# Altium PCB PONG_2.PcbDoc (part 1 of 3)
Units mm, origin at the board's own origin, x right, y up, seen from the top; angles counter-clockwise.
Board outline 310.01 x 220.09 mm, 2 copper layers (Top Layer, Bottom Layer); 106 components, 226 nets, 1005 pads, 373 vias.
Unrouted connection lines stored in the file: 5.
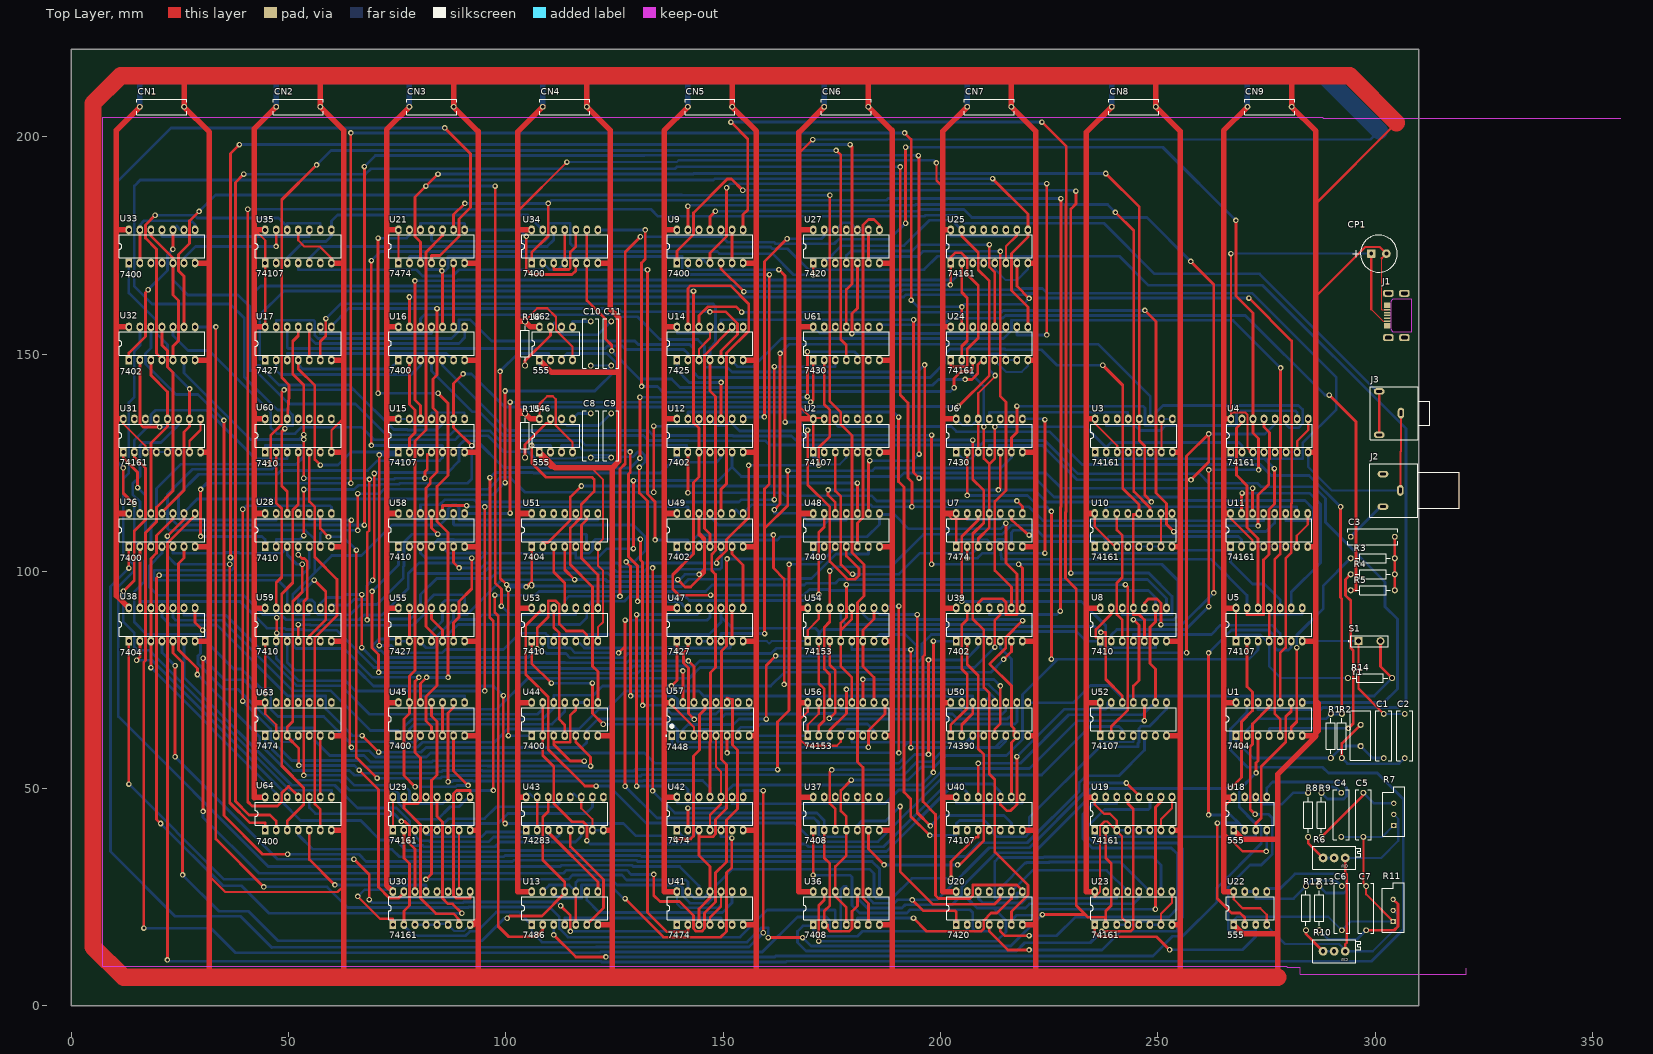
[diagram p0: Top Layer view]
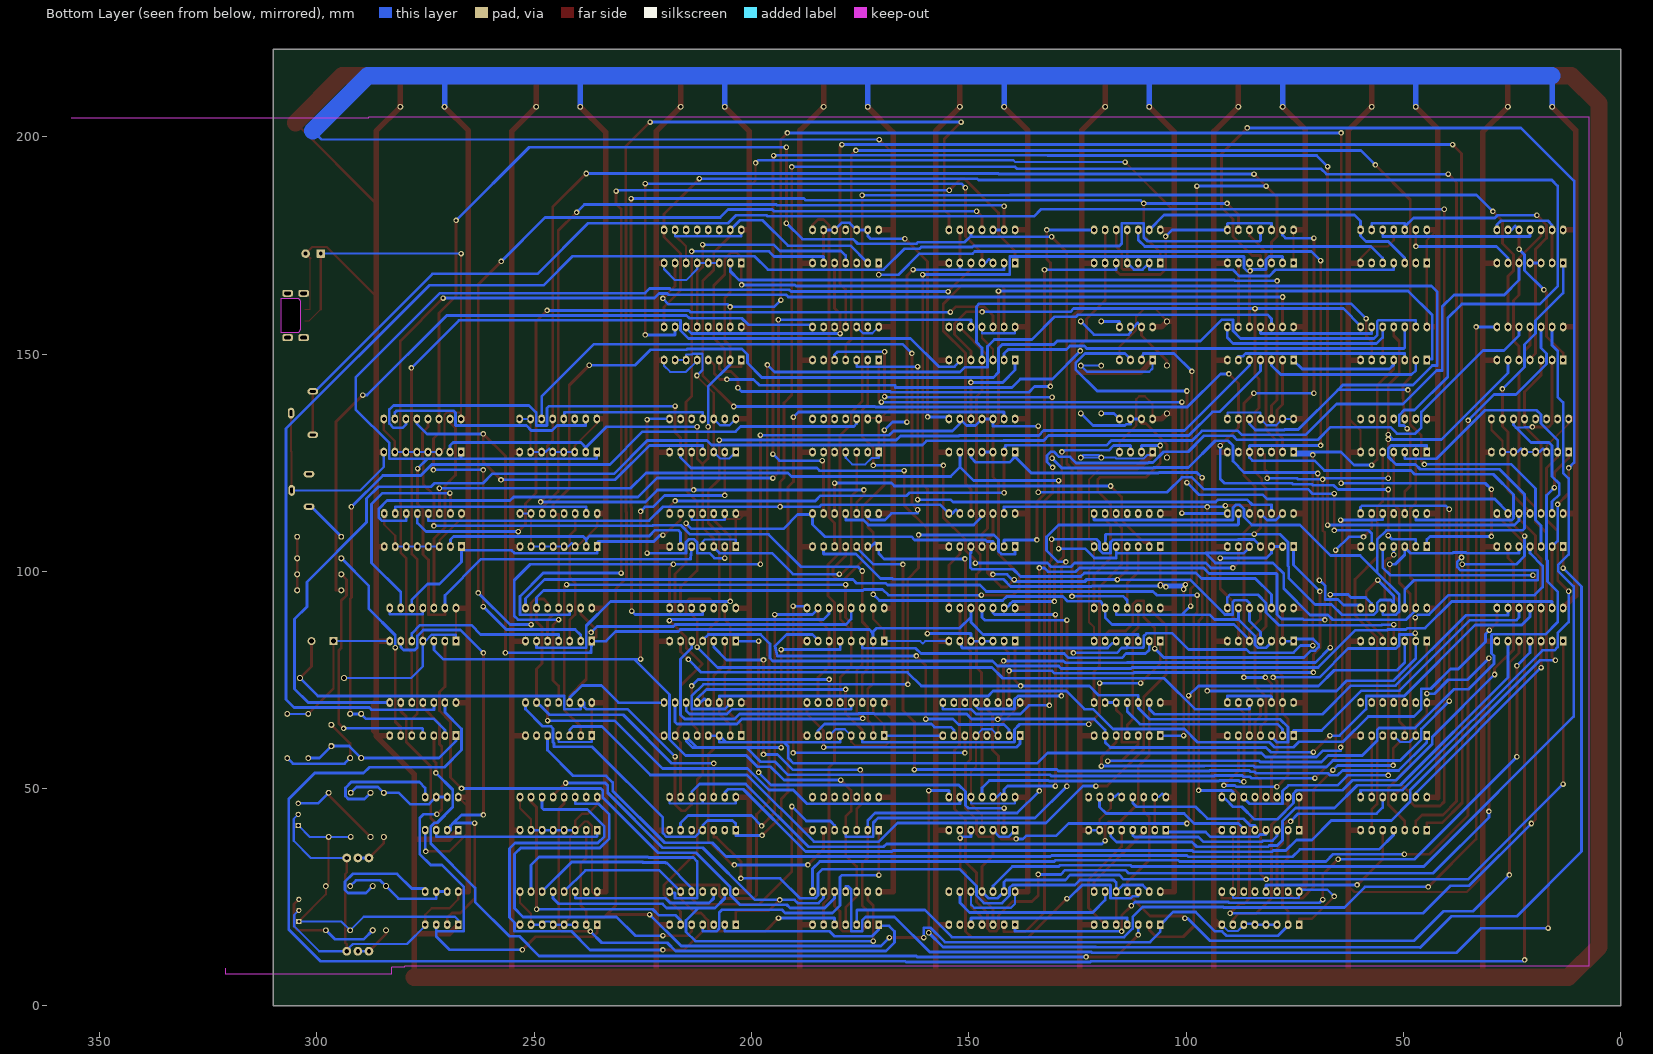
[diagram p1: Bottom Layer view, seen from below]

## Layer stack, top to bottom
Top Solder: solder mask 0.0102, Solder Resist, Dk 3.5
Top Layer: signal copper 0.0356
Dielectric 1: dielectric 0.32, FR-4, Dk 4.8
Bottom Layer: signal copper 0.0356
Bottom Solder: solder mask 0.0102, Solder Resist, Dk 3.5

## Board outline
0,0 310.007,0 310.007,220.091 0,220.091

## Design rules (kind name [scope] priority, off if disabled: settings)
Clearance Clearance_1 [All] p1: gap=0.18 except(0.5: Track-Track)
Clearance [All] p2: gap=0.18
PolygonConnect [All] p1: connectstyle=Relief reliefconductorwidth=0.254 reliefentries=4 polygonreliefangle="90 Angle" airgapwidth=0.254
RoutingTopology VCC_GND_Shortest [(InNet('VCC') OR InNet('GND'))] p1: topology=Shortest
RoutingTopology HorizBot [OnLayer('Bottom Layer')] p2: topology=Horizontal
RoutingTopology VertTop [OnLayer('Top Layer')] p3: topology=Vertical
RoutingTopology [All] p4: topology=Shortest
RoutingVias [All] p1: holewidth=0.711 width=1.27 viastyle="Through Hole" minholewidth=0.711 minwidth=1.27 maxholewidth=0.711 maxwidth=1.27
SMDNeckDown [All] p1: percent=50.000
SolderMaskExpansion [All] p1: expansion=0.102
Width "Power Width" [(InNet('VCC') OR InNet('GND'))] p1: maxlimit=4 minlimit=0.508 preferedwidth=0.508
Width [All] p2: maxlimit=0.635 minlimit=0.635 preferedwidth=0.635
29 further rules are at their usual default settings.

## Classes and differential pairs
component class VSYNC: U10 U11 U12
component class VertBallCounter: U29 U30
component class VertBallControl: U36 U37 U38 U39 U40 U41 U42 U43
component class SYNC-VideoSum: C3 J2 R3 R4 R5 U13 U14
component class Sound: C10 C11 J3 R16 U62 U63 U64
component class ScoreDisplay_2: U58 U59 U60 U61
component class ScoreDisplay_1: U54 U55 U56 U57
component class ScoreCount: U49 U50 U51 U52 U53
component class POWER: CN1 CN2 CN3 CN4 CN5 CN6 CN7 CN8 CN9 CP1 J1
component class Paddle_2: C6 C7 R10 R11 R12 R13 U21 U22 U23
component class Paddle_1: C4 C5 R6 R7 R8 R9 U18 U19 U20
component class Net: U15 U16 U17
component class HSYNC: U3 U4 U5 U6 U7 U8 U9
component class HorizBallCounter: U24 U25 U26 U27 U28
component class HorizBallControl: U31 U32 U33 U34 U35
component class GameControl: C8 C9 R14 R15 S1 U44 U45 U46 U47 U48
component class CLK: C1 C2 R1 R2 U1 U2 Y1

## Components (designator, comment, footprint, x,y, rotation, side; value= is the part's Value field where it differs from the comment)
C1 "Cap" CAPR10.16-11.5x3.6 302.006,62.103 r270 top
C2 "Cap" CAPR10.16-11.5x3.6 306.832,62.103 r270 top
C3 "Cap" CAPR10.16-11.5x3.6 299.466,107.95 r180 top
C4 "Cap" CAPR10.16-11.5x3.6 292.227,43.942 r90 top
C5 "Cap" CAPR10.16-11.5x3.6 297.307,43.942 r90 top
C6 "Cap" CAPR10.16-11.5x3.6 292.354,22.479 r90 top
C7 "Cap" CAPR10.16-11.5x3.6 297.942,22.479 r270 top
C8 "Cap" CAPR10.16-11.5x3.6 119.507,131.245 r90 top
C9 "Cap" CAPR10.16-11.5x3.6 124.206,131.245 r90 top
C10 "Cap" CAPR10.16-11.5x3.6 119.507,152.421 r90 top
C11 "Cap" CAPR10.16-11.5x3.6 124.206,152.421 r90 top
CN1 "Cap" CAPR10.16-11.5x3.6 20.828,206.883 r180 top
CN2 "Cap" CAPR10.16-11.5x3.6 52.197,206.883 r180 top
CN3 "Cap" CAPR10.16-11.5x3.6 82.863,206.883 r180 top
CN4 "Cap" CAPR10.16-11.5x3.6 113.529,206.883 r180 top
CN5 "Cap" CAPR10.16-11.5x3.6 146.95,206.883 r180 top
CN6 "Cap" CAPR10.16-11.5x3.6 178.324,206.883 r180 top
CN7 "Cap" CAPR10.16-11.5x3.6 211.222,206.883 r180 top
CN8 "Cap" CAPR10.16-11.5x3.6 244.475,206.883 r180 top
CN9 "Cap" CAPR10.16-11.5x3.6 275.717,206.883 r180 top
CP1 "Cap" CAPE3.5mm 300.863,173.101 r0 top
J1 "USB Micro Type B (recommended if hand soldering)" USB_Micro-B_FCI_SMD 308.356,158.877 r90 top
J2 "Video OUT" RCA 305.816,118.618 r180 top
J3 "Audio OUT" "3.5mm Audio Jack Parallel" 305.943,136.398 r180 top
R1 "Res1" AXIAL-0.4 289.814,62.103 r270 top
R2 "Res1" AXIAL-0.4 292.354,62.103 r270 top
R3 "Res1" AXIAL-0.4 299.466,102.997 r0 top
R4 "Res1" AXIAL-0.4 299.466,99.314 r0 top
R5 "Res1" AXIAL-0.4 299.466,95.631 r0 top
R6 "RPot" TRIMPOT_THT_PV36X 290.576,34.036 r180 top
R7 "RPot" VR5 304.292,44.069 r90 top
R8 "Res1" AXIAL-0.4 284.607,43.942 r270 top
R9 "Res1" AXIAL-0.4 287.655,43.942 r270 top
R10 "RPot" TRIMPOT_THT_PV36X 290.576,12.573 r180 top
R11 "RPot" VR5 304.165,21.971 r90 top
R12 "Res1" AXIAL-0.4 284.099,22.479 r270 top
R13 "Res1" AXIAL-0.4 287.147,22.479 r270 top
R14 "Res1" AXIAL-0.4 298.831,75.438 r180 top
R15 "Res1" AXIAL-0.4 104.394,131.245 r90 top
R16 "Res1" AXIAL-0.4 104.394,152.421 r90 top
S1 "COIN SW" SPST-2 298.704,83.947 r0 top
U1 "7404" N014 275.622,65.986 r0 top
U2 "74107" N014D 178.324,131.245 r0 top
U3 "74161" N016 244.475,131.245 r0 top
U4 "74161" N016 275.717,131.245 r0 top
U5 "74107" N014 275.622,87.739 r0 top
U6 "7430" N014 211.222,131.245 r0 top
U7 "7474" N014D 211.222,109.492 r0 top
U8 "7410" N014 244.375,87.739 r0 top
U9 "7400" N014 146.95,174.752 r0 top
U10 "74161" N016 244.375,109.492 r0 top
U11 "74161" N016 275.622,109.492 r0 top
U12 "7402" N014 146.95,131.245 r0 top
U13 "7486" N014 113.529,22.479 r0 top
U14 "7425" N014 146.95,152.421 r0 top
U15 "74107" N014 82.863,131.245 r0 top
U16 "7400" N014 82.863,152.421 r0 top
U17 "7427" N014 52.197,152.421 r0 top
U18 "555" P008 271.272,44.232 r0 top
U19 "74161" N016 244.375,44.232 r0 top
U20 "7420" N014 211.222,22.479 r0 top
U21 "7474" N014D 82.863,174.752 r0 top
U22 "555" P008 271.272,22.479 r0 top
U23 "74161" N016 244.375,22.479 r0 top
U24 "74161" N016 211.222,152.421 r0 top
U25 "74161" N016 211.222,174.752 r0 top
U26 "7400" N014 20.828,109.492 r0 top
U27 "7420" N014 178.324,174.752 r0 top
U28 "7410" N014 52.197,109.492 r0 top
U29 "74161" N016 82.863,44.232 r0 top
U30 "74161" N016 82.863,22.479 r0 top
U31 "74161" N016 20.828,131.245 r0 top
U32 "7402" N014 20.828,152.421 r0 top
U33 "7400" N014 20.828,174.752 r0 top
U34 "7400" N014 113.529,174.752 r0 top
U35 "74107" N014 52.197,174.752 r0 top
U36 "7408" N014 178.324,22.479 r0 top
U37 "7408" N014 178.324,44.232 r0 top
U38 "7404" N014 20.828,87.739 r0 top
U39 "7402" N014 211.222,87.739 r0 top
U40 "74107" N014 211.222,44.232 r0 top
U41 "7474" N014D 146.95,22.479 r0 top
U42 "7474" N014D 146.95,44.232 r0 top
U43 "74283" N016D#1 113.529,44.232 r0 top
U44 "7400" N014 113.529,65.986 r0 top
U45 "7400" N014 82.863,65.986 r0 top
U46 "555" P008 111.506,131.245 r0 top
U47 "7427" N014 146.95,87.739 r0 top
U48 "7400" N014 178.324,109.492 r0 top
U49 "7402" N014 146.95,109.492 r0 top
U50 "74390" N016 211.222,65.986 r0 top
U51 "7404" N014 113.529,109.492 r0 top
U52 "74107" N014 244.375,65.986 r0 top
U53 "7410" N014 113.529,87.739 r0 top
U54 "74153" N016 178.324,87.739 r0 top
U55 "7427" N014 82.863,87.739 r0 top
U56 "74153" N016 178.324,65.986 r0 top
U57 "7448" N016D#2 147.066,65.986 r90 top
U58 "7410" N014 82.863,109.492 r0 top
U59 "7410" N014 52.197,87.739 r0 top
U60 "7410" N014 52.197,131.245 r0 top
U61 "7430" N014 178.324,152.421 r0 top
U62 "555" P008 111.506,152.421 r0 top
U63 "7474" N014D 52.197,65.986 r0 top
U64 "7400" N014 52.197,44.232 r0 top
Y1 "14.318 Mhz" HC-49U 296.672,62.23 r90 top

## Footprints (in the part's own frame and the unit in brackets; to place one, negate y for a bottom-side part, rotate by r counter-clockwise, add the part's x,y. Pads: shape width x height; smd on the part's side, far side on the other; paste and mask are expansions set on the pad)
"3.5mm Audio Jack Parallel" [mm] "3.5mm Audio Jack, 3 pin"
  oval 1.5x2.5 hole 0.6 slot 1.31 at 90 deg: 1(0,0)
  oval 2.5x1.5 hole 0.6 slot 1.31 at 0 deg: 2(5,5) 5(5,-5)
  silkscreen extent -6.62,-6.13 7,6.13
AXIAL-0.4 [mm] "Axial Device, Thru-Hole; 2 Leads; 0.4 in Pin Spacing"
  round 1.4 hole 0.85: 1(-5.08,0) 2(5.08,0)
  silkscreen extent -4.06,-1.02 4.06,1.02
CAPE3.5mm [mm]
  round 0.508 on Mech15: 0(0,0)
  rrect25% 2x2 hole 0.9: 1(-1.75,0)
  round 2 hole 0.9: 2(1.75,0)
  silkscreen extent -6.05,-4.25 4.25,4.25, body extent -4.25,-4.25 4.22,4.23, height 7.1
CAPR10.16-11.5x3.6 [mm] "Capacitor, Ceramic, Thru-Hole, Dipped Radial; Body 11.5 x 3.6 mm (WxT) Pin Spacing 10.16 mm (typ)"
  round 1.35 hole 0.8: 1(-5.08,0) 2(5.08,0)
  silkscreen extent -5.75,-1.8 5.75,1.8
HC-49U [mm] "Quartz Crystal, Thru-Hole; 2 Leads; Body 11.35 x 4.65 x 13.46 mm (LxWxH max)"
  oct 1.4x1.4 hole 0.8: 1(-2.44,0)
  round 1.4 hole 0.8: 2(2.44,0)
  silkscreen extent -5.7,-2.35 5.7,2.35
N014 [mil] "DIP; 14 Leads; Row Spacing 7.62 mm; Pitch 2.54 mm"
  rect 60x80 hole 35.43: 1(-300,-150)
  oval 60x80 hole 35.43: 2(-200,-150) 3(-100,-150) 4(0,-150) 5(100,-150) 6(200,-150) 7(300,-150) 8(300,150) 9(200,150) 10(100,150) 11(0,150) 12(-100,150) 13(-200,150) 14(-300,150)
  silkscreen extent -388,-104 388,104
N014D [mil] "DIP; 14 Leads; Row Spacing 7.62 mm; Pitch 2.54 mm"
  rect 60x80 hole 35.43: 1(-300,-150)
  oval 60x80 hole 35.43: 2(-200,-150) 3(-100,-150) 4(0,-150) 5(100,-150) 6(200,-150) 7(300,-150) 8(300,150) 9(200,150) 10(100,150) 11(0,150) 12(-100,150) 13(-200,150) 14(-300,150)
  silkscreen extent -388,-104 388,104
N016 [mil] "DIP; 16 Leads; Row Spacing 7.62 mm; Pitch 2.54 mm"
  rect 60x80 hole 35.43: 1(-350,-150)
  oval 60x80 hole 35.43: 2(-250,-150) 3(-150,-150) 4(-50,-150) 5(50,-150) 6(150,-150) 7(250,-150) 8(350,-150) 9(350,150) 10(250,150) 11(150,150) 12(50,150) 13(-50,150) 14(-150,150) 15(-250,150) 16(-350,150)
  silkscreen extent -388,-104 388,104
N016D#1 [mil] "DIP; 16 Leads; Row Spacing 7.62 mm; Pitch 2.54 mm"
  rect 60x80 hole 35.43: 1(-350,-150)
  oval 60x80 hole 35.43: 2(-250,-150) 3(-150,-150) 4(-50,-150) 5(50,-150) 6(150,-150) 7(250,-150) 8(350,-150) 9(350,150) 10(250,150) 11(150,150) 12(50,150) 13(-50,150) 14(-150,150) 15(-250,150) 16(-350,150)
  silkscreen extent -388,-104 388,104
N016D#2 [mil] "DIP, 16-Leads, Row Spacing 7.62mm, Pitch 2.54mm, Body 19.31x6.35mm"
  rect 80x60 hole 35.43: 1(-150,350)
  oval 80x60 hole 35.43: 2(-150,250) 3(-150,150) 4(-150,50) 5(-150,-50) 6(-150,-150) 7(-150,-250) 8(-150,-350) 9(150,-350) 10(150,-250) 11(150,-150) 12(150,-50) 13(150,50) 14(150,150) 15(150,250) 16(150,350)
  silkscreen extent -155,-390 104,406, body extent -130,-390 130,390, height 200
P008 [mil] "DIP; 8 Leads; Row Spacing 7.62 mm; Pitch 2.54 mm"
  rect 60x80 hole 35.43: 1(-150,-150)
  oval 60x80 hole 35.43: 2(-50,-150) 3(50,-150) 4(150,-150) 5(150,150) 6(50,150) 7(-50,150) 8(-150,150)
  silkscreen extent -217,-104 217,104
RCA [mm] "RCA, 3 pin"
  oval 1.5x2.5 hole 0.6 slot 1.31 at 90 deg: 1(0,0)
  oval 2.5x1.5 hole 0.6 slot 1.31 at 0 deg: 2(4,3.75) 3(4,-3.75)
  silkscreen extent -13.5,-6.13 7,6.13
SPST-2 [mm] "Switch; 2 Leads"
  rect 1.85x1.85 hole 1.1: 1(-2.54,0)
  round 1.85 hole 1.1: 2(2.54,0)
  silkscreen extent -4.89,-1.27 4.28,1.27
TRIMPOT_THT_PV36X [mil] "TRIMMER, MURATA, PV36X"
  round 80 hole 38: CCW(100,0) CW(-100,0) W(0,0)
  silkscreen extent -240,-104 195,104, body extent -240,-98 189,98, height 394
USB_Micro-B_FCI_SMD [mm]
  round 0.508 on Mech15: 0(0,0)
  rrect20% 0.35x1.5 smd: 1(-1.3,5.6) 2(-0.65,5.6) 3(0,5.6) 4(0.65,5.6) 5(1.3,5.6)
  rrect50% 1.6x2.4 hole 0.8 slot 1.5 at 90 deg: SH(-5.1,1.6) SH(-5.1,5.3) SH(5.1,1.6) SH(5.1,5.3)
  rrect20% 1.2x1.5 smd: SH(-2.35,5.6) SH(2.35,5.6)
  Keep-Out Layer board cut-out: -3.9,0 -3.9,3.797 -3.839,4.103 -3.666,4.362 -3.406,4.536 -3.1,4.597 -3.1,4.597 3.1,4.597 3.406,4.536 3.666,4.362 3.839,4.103 3.9,3.797 3.9,3.797 3.9,0
  body extent -5.35,-21.58 5.35,5.8, height 4.67
VR5 [mm] "Thru-Hole; 3 Leads"
  rect 1.2x1.2 hole 0.7: 1(-2.54,0)
  round 1.2 hole 0.7: 2(0,0) 3(2.54,0)
  silkscreen extent -5.08,-2.54 6.35,2.54

## Part data
C1 C2 C3 C4 C5 C6 C7 C8 C9 C10 C11 CN1 CN2 CN3 CN4 CN5 CN6 CN7 CN8 CN9 CP1: "Capacitor"
J1: library part USB_Micro_TypeB_FCI, "Connector SMD-THD USB Micro Type B middle mount"
J2: library part "Phonejack2 TN", "Jack Socket, 1/4\" [6.5mm], Thru-Hole, Vertical, 2-Conductor with Tip closed"
J3: library part "Phonejack Stereo SW", "3-Conductor Jack with 2 break contacts (normals) and 2 auxiliary make contacts"
R1 R2 R3 R4 R5 R8 R9 R12 R13 R14 R15 R16: "Resistor"
R6 R7 R10 R11: "Potentiometer"
S1: library part SW-PB, "Switch"
U1 U38 U51: library part SN74LS04N, "Hex Inverter"
U2: library part SN74HC107N, "Dual J-K Negative-Edge-Triggered Flip-Flop with Clear"
U3 U4 U10 U11 U19 U23 U24 U25 U29 U30 U31: library part SN74LS161AN, "Synchronous 4-Bit Counter"
U5 U15 U35 U40 U52: library part SN74LS107AN, "Dual J-K Flip-Flop with Clear"
U6 U61: library part SN74LS30N, "8-Input Positive-NAND Gate"
U7 U21 U41 U42 U63: library part SN74LS74AN, "Dual D-Type Positive-Edge-Triggered Flip-Flop with Preset and Clear"
U8 U28 U53 U58 U59 U60: library part SN74LS10N, "Triple 3-Input Positive-NAND Gate"
U9 U16 U26 U33 U34 U44 U45 U48 U64: library part SN74LS00N, "Quadruple 2-Input Positive-NAND Gate"
U12 U32 U39 U49: library part SN74LS02N, "Quadruple 2-Input Positive-NOR Gate"
U13: library part SN74LS86AN, "Quadruple 2-Input Exclusive-OR Gate"
U14: library part SN7425N, "Dual 4-Input NOR Gate with Strobe"
U17 U47 U55: library part SN74LS27N, "Triple 3-Input Positive-NOR Gate"
U18 U22 U46 U62: library part NE555P, "Precision Timer"
U20 U27: library part SN74LS20N, "Dual 4-Input Positive-NAND Gate"
U36 U37: library part SN74LS08N, "Quadruple 2-Input Positive-AND Gate"
U43: library part SN54S283FK, "4-Bit Binary Full Adder with Fast Carry"
U50: library part SN74LS390N, "Dual 4-Bit Decade and Binary Counter"
U54 U56: library part SN74LS153N, "Dual 4-Line to 1-Line Data Selector/Multiplexer"
U57: library part SN74LS48N, "BCD-to-Seven-Segment Decoder/Driver"
Y1: library part XTAL, "Crystal Oscillator"

## Via types
v1: diameter 1.27, hole 0.711, Top Layer to Bottom Layer, 373 vias

## Nets (pads, with @x,y where several pads share a name; then routed paths per layer and width w, separated by ;. In a path a pad name is that pad's centre, name@x,y a point inside that pad or via, vN(x,y) a via of type N, cw(c..) or ccw(c..) an arc to the next point about the centre after c; other vN are vias at no path point)
1H: U3.14
1V: U8.3 U10.14 | length 31
  Top Layer w0.635: U10.14@240.565,113.302 240.565,109.499 241.833,108.231 241.833,98.628 240.563,97.358 240.563,90.018 241.835,88.746 U8.3@241.835,83.929
2H: U3.13 U6.11 | length 34.8
  Bottom Layer w0.635: U6.11@211.222,135.055 211.222,136.576 243.014,136.576 U3.13@243.205,135.055
2V: U10.13
4H: U3.12 U6.5 U21.3 U48.12 U53.10 U55.3 U55.9 | length 508.4
  Top Layer w0.635: U21.3@80.323,170.942 80.323,175.76 79.045,177.038 79.045,186.106 v1(81.585,188.646) v1(84.353,191.414) ; v1(97.511,188.646) 97.511,97.332 98.95,95.892 v1(98.95,91.973) ; v1(174.117,118.72) 174.117,117.526 175.784,115.859 U48.12@175.784,113.302 ; v1(213.309,118.72) 213.762,119.173 U6.5@213.762,127.435 ; v1(238.023,191.541) 245.745,183.82 U3.12@245.745,135.055 245.745,130.048 247.015,128.778 247.015,117.5 v1(248.539,115.976)
  Bottom Layer w0.635: U55.3@80.323,83.929 80.323,83.668 81.575,82.415 83.439,82.415 84.125,83.101 84.125,85.09 87.943,88.908 ; v1(81.585,188.646) v1(97.511,188.646) ; v1(84.353,191.414) 143.078,191.414 143.205,191.541 v1(238.023,191.541) ; U55.9@87.943,91.549 87.943,88.908 ; v1(98.95,91.973) 100.906,90.018 ; U53.10@116.069,91.549 116.069,90.018 100.906,90.018 ; v1(174.117,118.72) v1(213.309,118.72) 221.666,118.72 224.409,115.976 v1(248.539,115.976) ; 87.943,88.908 87.943,88.9 93.456,88.9 94.573,90.018 100.906,90.018
4V: U8.5 U8.11 U10.12 U17.13 | length 282.8
  Top Layer w0.635: v1(237.338,147.422) 241.935,142.824 241.935,119.075 245.645,115.366 U10.12@245.645,113.302 245.645,113.055 244.375,113.055 U8.11@244.375,91.549 244.375,90.01 245.74,90.01 246.915,88.835 U8.5@246.915,83.929
  Bottom Layer w0.635: U17.13@47.117,156.231 47.117,157.759 55.728,157.759 56.007,157.48 56.007,154.305 56.744,153.568 87.427,153.568 89.205,155.346 89.205,157.912 91.745,157.912 96.671,152.986 129.627,152.986 130.429,152.184 142.296,152.184 143.15,151.329 143.15,145.795 144.323,144.622 197.632,144.622 200.939,147.93 200.939,149.86 202.212,151.133 214.76,151.133 214.907,150.985 223.207,150.985 226.771,147.422 v1(237.338,147.422)
7S_A: U57.13 U59.3 | length 164.3
  Top Layer w0.635: v1(99.39,71.374) 99.39,42.367 v1(99.797,41.961) ; v1(139.09,38.405) 142.494,38.405 143.14,39.05 143.14,57.516 144.526,58.903 144.526,66.98 145.796,68.25 U57.13@145.796,69.796
  Bottom Layer w0.635: U59.3@49.657,83.929 49.657,79.052 51.488,77.221 65.884,77.221 69.495,73.609 97.155,73.609 v1(99.39,71.374) ; v1(99.797,41.961) 127.051,41.961 129.845,39.167 136.728,39.167 137.49,38.405 v1(139.09,38.405)
7S_B: U57.12 U58.9 | length 111.2
  Top Layer w0.635: v1(127.635,102.184) 128.676,101.143 v1(128.676,71.323)
  Bottom Layer w0.635: U58.9@87.943,113.302 87.943,110.761 88.062,110.642 129.362,110.642 132.08,107.925 132.08,104.775 129.489,102.184 v1(127.635,102.184) ; v1(128.676,71.323) 138.684,71.323 139.446,70.561 139.446,68.282 147.708,68.282 148.336,68.91 U57.12@148.336,69.796
7S_C: U57.11 U59.1 | length 256.8
  Top Layer w0.635: v1(30.277,44.755) v1(30.277,79.985) ; v1(44.577,71.831) U59.1@44.577,83.929 ; v1(134.01,30.251) 134.01,25.4 135.415,23.995 139.896,23.995 143.14,20.752 143.14,17.78 143.775,17.145 145.045,17.145 145.68,17.78 145.68,21.355 148.23,23.905 148.23,30.628 150.749,33.147 150.749,42.748 153.289,45.288 153.289,58.877 152.146,60.02 152.146,70.561 151.072,70.776 150.876,70.815 U57.11@150.876,69.796
  Bottom Layer w0.635: v1(30.277,44.755) 30.277,43.367 43.138,30.505 113.23,30.505 113.943,31.218 127.806,31.218 128.772,30.251 v1(134.01,30.251) ; v1(30.277,79.985) 35.224,75.037 39.644,75.037 42.85,71.831 v1(44.577,71.831)
7S_D: U57.10 U60.13
7S_E: U57.9 U58.4 | length 119.8
  Top Layer w0.635: v1(130.937,107.366) 130.937,102.641 131.42,102.159 v1(131.42,69.147)
  Bottom Layer w0.635: U58.4@82.863,105.682 82.863,105.843 84.319,107.299 87.963,107.299 88.018,107.244 116.784,107.244 117.348,106.68 117.348,104.169 119.18,104.169 119.888,104.877 119.888,106.68 120.574,107.366 v1(130.937,107.366) ; v1(131.42,69.147) 136.119,69.147 138.119,67.147 148.343,67.147 149.471,68.275 155.956,68.275 U57.9@155.956,69.796
7S_F: U57.15 U58.1 | length 109.7
  Top Layer w0.635: v1(69.19,95.386) 69.19,82.347 70.688,80.848 v1(70.688,76.733) ; U57.15@140.716,69.796 v1(140.716,77.089)
  Bottom Layer w0.635: v1(69.19,95.386) 75.243,101.439 U58.1@75.243,105.682 ; v1(70.688,76.733) 111.884,76.733 112.097,76.521 130.281,76.521 130.849,77.089 v1(140.716,77.089)
7S_G: U57.14 U59.9 | length 110.5
  Top Layer w0.635: v1(66.802,82.448) v1(66.802,94.64) ; v1(141.986,79.359) 143.256,78.089 U57.14@143.256,69.796
  Bottom Layer w0.635: U59.9@57.277,91.549 57.277,92.583 58.651,93.957 61.996,93.957 62.679,94.64 v1(66.802,94.64) ; v1(66.802,82.448) 70.24,79.01 113.58,79.01 113.632,78.958 127.776,78.958 128.178,79.359 v1(141.986,79.359)
8H: U3.11 U48.13 U53.9 U55.5 U55.11 | length 268.3
  Top Layer w0.635: U55.11@82.863,91.549 82.863,89.002 85.403,86.462 U55.5@85.403,83.929 ; v1(161.747,114.173) 163.068,115.494 v1(163.068,150.139) ; v1(171.983,94.666) 171.983,108.95 173.244,110.211 U48.13@173.244,113.302
  Bottom Layer w0.635: U55.5@85.403,83.929 85.403,84.176 88.984,87.757 117.043,87.757 118.609,89.323 U53.9@118.609,91.549 118.821,91.549 119.647,93.104 127.252,93.104 128.345,94.197 141.245,94.197 142.193,93.25 170.568,93.25 v1(171.983,94.666) ; v1(161.747,114.173) 161.747,113.335 167.745,113.335 169.291,111.789 172.612,111.789 173.244,112.42 U48.13@173.244,113.302 ; v1(163.068,150.139) 165.196,152.268 236.251,152.268 248.285,140.233 U3.11@248.285,135.055
8V: U9.12 U9.13 U10.11 | length 179.8
  Top Layer w0.635: U9.13@141.87,178.562 v1(141.87,183.998) ; v1(240.259,182.575) 244.475,178.359 244.475,118.339 248.185,114.629 U10.11@248.185,113.302
  Bottom Layer w0.635: U9.13@141.87,178.562 U9.12@144.41,178.562 ; v1(141.87,183.998) 142.09,184.218 194.073,184.218 194.235,184.38 238.454,184.38 v1(240.259,182.575)
16H: U4.14 U8.2 U9.10 U51.3 U53.11 | length 409.6
  Top Layer w0.635: U51.3@110.989,105.682 110.989,99.873 113.529,97.333 U53.11@113.529,91.549 ; v1(126.238,94.239) 126.238,123.549 127.437,124.747 127.437,173.512 v1(130.912,176.987) ; v1(191.948,180.086) v1(191.948,197.587) ; v1(261.722,91.872) v1(261.722,123.342) ; v1(267.97,180.746) 267.97,163.373 271.907,159.436 U4.14@271.907,135.055 271.907,131.801 273.177,130.531 v1(273.177,123.342)
  Bottom Layer w0.635: U53.11@113.529,91.549 113.529,93.345 114.423,94.239 v1(126.238,94.239) ; v1(130.912,176.987) 149.49,176.987 149.49,177.165 ; U9.10@149.49,178.562 149.49,177.165 ; v1(191.948,180.086) 188.29,176.428 176.606,176.428 175.549,175.371 162.042,175.371 161.666,175.747 150.907,175.747 149.49,177.165 ; v1(191.948,197.587) 251.13,197.587 v1(267.97,180.746) ; U8.2@239.295,83.929 239.295,85.32 240.563,86.589 256.438,86.589 v1(261.722,91.872) ; v1(261.722,123.342) v1(273.177,123.342)
16V: U11.14 U12.6 U51.5 U58.5 U59.13 U60.2 | length 314.7
  Top Layer w0.635: U59.13@47.117,91.549 47.117,97.358 48.387,98.628 48.387,114.427 47.117,115.697 U60.2@47.117,127.435 ; v1(129.337,105.207) v1(129.337,120.871) ; U11.14@271.812,113.302 v1(271.812,119.118)
  Bottom Layer w0.635: U59.13@47.117,91.549 47.117,91.11 49.376,88.851 66.227,88.851 67.341,89.964 71.424,89.964 77.513,96.053 77.513,99.46 79.951,101.899 93.243,101.899 95.528,104.165 ; U58.5@85.403,105.682 85.403,105.453 86.687,104.169 90.875,104.169 90.941,104.234 95.46,104.234 95.528,104.165 ; U51.5@116.069,105.682 116.069,104.165 ; v1(129.337,105.207) 123.266,105.207 121.093,103.034 116.069,103.034 116.069,104.165 ; v1(129.337,120.871) 148.923,120.871 152.03,123.977 ; U12.6@152.03,127.435 152.03,123.977 ; v1(271.812,119.118) 227.795,119.118 224.271,122.642 191.591,122.642 190.792,121.844 154.163,121.844 152.03,123.977 ; 95.528,104.165 116.069,104.165
32H: U4.13 U54.14 U56.14 | length 160.5
  Top Layer w0.635: U56.14@174.514,69.796 174.514,76.225 173.253,77.486 173.253,87.122 174.514,88.383 U54.14@174.514,91.549 v1(174.514,100.067) ; v1(273.075,110.465) 273.075,117.558 275.534,120.017 275.534,125.697 275.717,125.879 275.717,131.953 274.447,133.223 U4.13@274.447,135.055
  Bottom Layer w0.635: v1(174.514,100.067) 175.489,101.041 188.595,101.041 196.063,108.509 214.102,108.509 216.191,110.598 222.666,110.598 222.799,110.465 v1(273.075,110.465)
32V: U11.13 U49.8 U49.9 U64.2 | length 516.6
  Top Layer w0.635: v1(39.649,191.389) 37.744,189.484 37.744,47.092 40.894,43.942 45.72,43.942 47.117,42.545 U64.2@47.117,40.422 ; v1(190.729,193.073) 190.729,140.524 192.484,138.768 192.484,121.51 193.421,120.574 v1(193.421,114.859)
  Bottom Layer w0.635: v1(39.649,191.389) 67.666,191.389 68.91,192.634 138.9,192.634 139.34,193.073 v1(190.729,193.073) ; U49.9@152.03,113.302 152.911,114.183 153.792,113.302 U49.8@154.57,113.302 154.57,113.323 156.575,115.328 183.891,115.328 184.361,114.859 v1(193.421,114.859) 220.344,114.859 223.544,111.658 274.352,111.658 U11.13@274.352,113.302
64H: U4.12 U6.4 U8.1 U8.13 U47.10 U53.3 U54.2 U56.2 | length 327.3
  Top Layer w0.635: U56.2@171.974,62.176 171.974,64.44 173.253,65.719 173.253,72.873 171.974,74.152 U54.2@171.974,83.929 ; U8.1@236.755,83.929 236.755,84.821 235.745,84.821 235.745,86.6 239.295,90.15 U8.13@239.295,91.549 ; v1(256.616,81.26) 256.616,126.492 v1(261.722,131.597) 261.722,125.142 v1(257.636,121.056)
  Bottom Layer w0.635: U53.3@110.989,83.929 110.989,85.471 146.696,85.471 149.49,88.265 149.49,89.499 ; U47.10@149.49,91.549 149.49,89.499 ; U6.4@211.222,127.435 211.222,128.956 223.469,128.956 231.369,121.056 v1(257.636,121.056) ; v1(256.616,81.26) 236.928,81.26 U8.1@236.755,83.929 236.755,83.922 233.496,83.922 231.242,86.175 216.778,86.175 216.376,86.577 172.826,86.577 172.203,85.954 ; v1(261.722,131.597) 274.676,131.597 276.987,133.909 U4.12@276.987,135.055 ; 149.49,89.499 152.095,86.893 171.263,86.893 172.203,85.954 ; 172.203,85.954 U54.2@171.974,83.929 171.974,85.725 172.203,85.954
64V: U11.12 U14.12 | length 186.6
  Top Layer w0.635: U14.12@144.41,156.231 144.41,158.837 146.431,160.858 153.01,160.858 v1(154.229,159.639) ; v1(247.015,160.029) 249.555,157.489 249.555,118.013 251.993,115.574 251.993,110.82 v1(253.67,109.144)
  Bottom Layer w0.635: v1(154.229,159.639) 214.036,159.639 214.427,160.029 v1(247.015,160.029) ; v1(253.67,109.144) 274.911,109.144 276.892,111.125 U11.12@276.892,113.302
128H: U4.11 U6.6 U16.10 U21.2 U47.3 U47.4 U47.5 | length 370.7
  Top Layer w0.635: v1@84.953,169.428 v1(85.268,169.113) 85.403,168.978 U16.10@85.403,156.231 ; v1(159.512,85.665) 159.512,109.855 ; v1(160.604,168.283) 160.604,120.067 159.512,118.975 159.512,109.855 ; v1(164.863,123.165) 164.863,115.206 159.512,109.855 ; U6.6@216.302,127.435 216.302,130.734 217.576,132.008 v1(217.576,137.998)
  Bottom Layer w0.635: U21.2@77.783,170.942 77.783,172.466 80.899,172.466 81.603,171.762 81.603,169.428 v1@84.953,169.428 ; v1(85.268,169.113) 85.979,169.113 86.663,169.797 86.663,172.438 86.69,172.466 140.589,172.466 140.589,168.283 v1(160.604,168.283) ; U47.3@144.41,83.929 U47.4@146.95,83.929 U47.5@149.49,83.929 149.49,85.665 v1(159.512,85.665) ; v1(164.863,123.165) 184.347,123.165 184.96,123.777 213.892,123.777 216.302,126.188 U6.6@216.302,127.435 ; v1(217.576,137.998) 246.568,137.998 247.025,137.541 247.025,133.542 249.545,133.542 249.545,136.525 251.196,138.176 282.372,138.176 283.337,137.211 283.337,133.985 282.372,133.02 280.289,133.02 279.527,133.782 U4.11@279.527,135.055
128V: U11.11 U14.10 | length 186.9
  Top Layer w0.635: v1(193.802,157.888) 193.802,122.733 v1(195.072,121.463)
  Bottom Layer w0.635: U14.10@149.49,156.231 149.49,157.888 v1(193.802,157.888) ; v1(195.072,121.463) 221.764,121.463 226.107,117.119 254.704,117.119 255.545,116.278 283.841,116.278 285.775,114.343 285.775,112.395 284.988,111.608 279.432,111.608 U11.11@279.432,113.302
256H: U5.3 U6.2 U15.1 U16.1 U17.4 U36.4 U36.12 U37.4 U47.11 U53.4 | length 521.1
  Top Layer w0.635: U17.4@52.197,148.611 52.197,146.557 56.007,142.747 56.007,125.705 v1(57.277,124.435) ; v1(70.841,82.906) v1(70.841,126.771) ; v1(125.933,81.229) 127.406,82.702 ; v1(127.406,50.537) 127.406,82.702 ; v1(127.406,88.748) 127.406,82.702 ; U36.4@178.324,18.669 178.324,22.662 175.784,25.202 U36.12@175.784,26.289 175.784,32.08 178.324,34.62 U37.4@178.324,40.422 178.324,43.57 177.063,44.831 177.063,49.581 v1(179.451,51.968) ; v1(206.142,117.45) U6.2@206.142,127.435 ; v1(225.527,79.781) v1(225.527,113.792)
  Bottom Layer w0.635: U17.4@52.197,148.611 52.197,147.523 53.186,146.534 73.259,146.534 75.243,148.518 U16.1@75.243,148.611 ; v1(57.277,124.435) 61.314,124.435 64.311,127.432 U15.1@75.243,127.432 ; v1(70.841,82.906) 73.635,82.906 75.26,81.28 85.344,81.28 86.08,82.017 99.441,82.017 103.149,85.725 109.093,85.725 109.728,85.09 109.728,82.652 109.966,82.414 113.529,82.414 ; v1(70.841,126.771) 75.243,126.771 U15.1@75.243,127.432 ; U15.1@75.243,127.435 U15.1@75.243,127.432 ; U53.4@113.529,83.929 113.529,82.414 ; v1(125.933,81.229) 115.901,81.229 114.809,82.321 113.622,82.321 113.529,82.414 ; v1(127.406,50.537) 134.722,43.221 170.901,43.221 171.983,42.139 171.983,38.909 178.324,38.909 U37.4@178.324,40.422 ; v1(127.406,88.748) 146.304,88.748 146.95,89.393 U47.11@146.95,91.549 ; v1(179.451,51.968) 192.524,51.968 195.582,55.026 198.587,55.026 201.193,57.633 215.163,57.633 218.846,61.316 218.846,71.628 227,79.781 ; v1(206.142,117.45) 220.023,117.45 222.631,114.841 224.477,114.841 v1(225.527,113.792) ; v1(225.527,79.781) 227,79.781 ; U5.3@273.082,83.929 273.082,81.915 270.948,79.781 227,79.781
256V: U5.5 U8.4 | length 38.8
  Bottom Layer w0.635: U8.4@244.375,83.929 244.375,85.446 262.312,85.446 264.467,87.601 276.286,87.601 278.162,85.725 U5.5@278.162,83.929
\256H: U5.2 U15.4 U17.11 U32.6 U36.2 U36.10 U37.2 | length 504.4
  Top Layer w0.635: U17.11@52.197,156.231 52.197,154.203 50.927,152.933 50.927,145.415 53.467,142.875 v1(53.467,131.47) v1(53.467,130.353) v1(53.467,121.412) ; v1(68.047,88.824) 68.047,108.892 68.555,109.4 v1(68.555,121.158) ; v1(81.356,121.412) 81.356,122.919 81.885,123.448 81.885,126.89 82.863,126.89 U15.4@82.863,127.435 ; v1(133.756,49.454) v1(133.756,100.762) ; U37.2@173.244,40.422 173.244,34.02 174.523,32.741 174.523,23.098 173.244,21.819 U36.2@173.244,18.669 173.965,18.669 173.965,17.78 174.6,17.145 178.968,17.145 179.603,17.78 179.603,21.752 180.864,23.012 U36.10@180.864,26.289 ; v1(266.725,50.038) 269.265,52.578 269.265,65.38 271.805,67.92 271.805,72.187 270.542,73.45 U5.2@270.542,83.929
  Bottom Layer w0.635: U32.6@25.908,148.611 25.908,145.644 41.199,130.353 ; v1(53.467,121.412) 68.301,121.412 v1@68.547,121.166 ; v1(53.467,130.353) 52.349,130.353 ; v1(53.467,131.47) 52.349,130.353 ; v1(68.047,88.824) 72.847,88.824 73.05,89.027 78.029,89.027 79.045,90.043 79.045,99.365 79.197,99.517 94.664,99.517 95.91,100.764 124.525,100.764 125.374,99.914 131.74,99.914 132.588,100.762 v1(133.756,100.762) ; v1(68.555,121.158) v1@68.547,121.166 ; v1(81.356,121.412) 74.487,121.412 74.241,121.166 v1@68.547,121.166 ; v1(133.756,49.454) 138.854,44.356 171.56,44.356 173.244,42.672 U37.2@173.244,40.422 ; U36.10@180.864,26.289 180.864,24.765 183.134,22.495 191.111,22.495 191.876,23.26 202.609,23.26 204.876,25.527 204.876,27.305 212.825,35.254 221.554,35.254 234.213,47.913 234.213,49.581 234.671,50.038 v1(266.725,50.038) ; 41.199,130.353 41.208,130.343 52.34,130.343 52.349,130.353 ; 41.199,130.353 52.349,130.353
\256V: U5.6 U18.2 U22.2 | length 106
  Top Layer w0.635: v1(261.671,43.942) v1(261.671,81.229) ; v1(263.703,42.062) 263.703,24.638 266.954,21.387 268.935,21.387 270.002,20.32 U22.2@270.002,18.669
  Bottom Layer w0.635: v1(261.671,43.942) 266.751,43.942 268.63,42.062 ; v1(261.671,81.229) 261.691,81.229 266.929,86.466 275.509,86.466 276.885,85.09 276.885,82.525 277.495,81.915 280.067,81.915 280.702,82.55 U5.6@280.702,83.929 ; v1(263.703,42.062) 268.63,42.062 ; U18.2@270.002,40.422 269.265,40.422 269.265,41.427 268.63,42.062
\ATTRACT: U21.4 U26.2 U38.13 U39.4 | length 428.4
  Top Layer w0.635: v1(11.913,123.8) 11.913,117.955 v1(14.478,115.389) ; U38.13@15.748,91.549 U26.2@15.748,105.682 ; U21.4@82.863,170.942 82.863,172.644 84.811,172.644 89.205,177.038 89.205,181.051 91.846,183.693 91.846,196.088 v1(85.903,202.032)
  Bottom Layer w0.635: v1(11.913,123.8) 10.668,125.044 10.668,189.789 22.911,202.032 v1(85.903,202.032) ; v1(14.478,115.389) 14.478,106.952 U26.2@15.748,105.682 ; U38.13@15.748,91.549 15.748,93.066 38.85,93.066 45.005,86.911 49.048,86.911 49.378,86.581 53.619,86.581 53.752,86.447 61.016,86.447 69.588,77.875 112.445,77.875 112.664,77.656 128.745,77.656 129.313,78.224 143.383,78.224 144.534,79.375 195.123,79.375 195.758,80.01 195.758,83.312 197.888,85.442 209.931,85.442 211.222,84.151 U39.4@211.222,83.929
\CLR: U15.10 U24.1 U25.1 U26.3 | length 348.8
  Top Layer w0.635: v1(45.136,124.612) 45.847,125.324 45.847,131.242 48.387,133.782 48.387,141.199 v1(48.946,141.757) ; v1(202.285,165.912) 202.332,165.96 U25.1@202.332,170.942 202.332,172.208 203.454,173.33 204.724,173.33 206.146,171.907 206.146,168.275 208.686,165.735 208.686,153.67 206.146,151.13 206.146,147.091 202.332,147.091 U24.1@202.332,148.611
  Bottom Layer w0.635: U26.3@18.288,105.682 18.288,110.541 19.558,111.811 19.558,119.028 25.142,124.612 v1(45.136,124.612) ; v1(48.946,141.757) 65.049,141.757 ; U15.10@85.403,135.055 85.403,133.892 84.044,132.532 77.389,132.532 77.281,132.64 74.167,132.64 65.049,141.757 ; v1(202.285,165.912) 190.043,165.912 189.764,165.633 43.51,165.633 42.172,164.295 42.172,147.371 43.307,147.371 47.803,142.875 63.932,142.875 65.049,141.757
\HBLANK: U9.3 U9.4 U24.10 | length 139.8
  Top Layer w0.635: U9.4@146.95,170.942 146.95,173.238 150.749,177.038 v1(150.749,188.265) ; v1(224.434,154.381) v1(224.434,189.2)
  Bottom Layer w0.635: U9.3@144.41,170.942 145.291,171.823 146.172,170.942 U9.4@146.95,170.942 ; v1(150.749,188.265) 151.684,189.2 v1(224.434,189.2) ; U24.10@217.572,156.231 217.572,154.381 v1(224.434,154.381)
\HIT: U48.3 U63.1 | length 184
  Top Layer w0.635: v1(162.509,54.381) 162.509,65.354 165.151,67.996 v1(165.151,101.6)
  Bottom Layer w0.635: U63.1@44.577,62.176 44.577,60.659 51.056,54.18 63.989,54.18 65.077,53.092 66.919,53.092 67.353,53.525 83.851,53.525 84.178,53.852 85.119,53.852 85.396,54.129 94.577,54.129 94.655,54.051 129.388,54.051 129.718,54.381 v1(162.509,54.381) ; v1(165.151,101.6) 171.949,101.6 175.784,105.435 U48.3@175.784,105.682
\HIT1: U21.13 U45.8 U45.12 | length 151.1
  Top Layer w0.635: v1(70.561,140.97) v1(70.561,176.657) ; U45.12@80.323,69.796 80.323,74.176 v1(81.712,75.565) ; v1(84.357,140.97) 86.665,138.663 86.665,122.088 84.125,119.548 84.125,111.466 86.665,108.926 v1(86.665,75.565)
  Bottom Layer w0.635: v1(70.561,140.97) v1(84.357,140.97) ; v1(70.561,176.657) 77.089,176.657 77.783,177.351 U21.13@77.783,178.562 ; U45.12@80.323,69.796 80.323,71.161 80.485,71.323 90.483,71.323 U45.8@90.483,69.796 ; v1(81.712,75.565) v1(86.665,75.565)
\HIT2: U21.10 U45.6 U45.13 | length 158
  Top Layer w0.635: v1(79.07,50.419) 76.505,52.984 76.505,65.981 77.783,67.259 U45.13@77.783,69.796 77.783,75.902 79.045,77.163 79.045,129.972 81.585,132.512 81.585,173.425 85.403,177.243 U21.10@85.403,178.562 ; U45.6@87.943,62.176 87.943,54.043 v1(91.262,50.724)
  Bottom Layer w0.635: v1(79.07,50.419) 88.395,50.419 88.7,50.724 v1(91.262,50.724)
\HRESET: U3.1 U4.1 U5.13 U7.5 U9.5 | length 335.6
  Top Layer w0.635: U9.5@149.49,170.942 149.49,169.611 v1(154.737,164.363) ; U5.13@270.542,91.549 270.542,90.018 274.345,90.018 274.345,102.641 275.615,103.911 275.615,114.249 276.835,115.468 v1(276.835,123.622)
  Bottom Layer w0.635: v1(154.737,164.363) 190.899,164.363 191.313,164.777 218.542,164.777 218.825,165.06 223.445,165.06 224.498,164.008 271.704,164.008 291.084,144.628 291.084,137.262 283.337,129.515 283.337,125.908 274.549,125.908 ; U7.5@213.762,105.682 214.002,102.794 262.211,102.794 270.542,94.463 U5.13@270.542,91.549 ; U3.1@235.585,127.435 235.585,125.908 266.827,125.908 ; U4.1@266.827,127.435 266.827,125.908 ; v1(276.835,123.622) 274.549,125.908 ; 266.827,125.908 274.549,125.908
\HSYNC: U9.8 U13.1 U19.2 U23.2 U29.2 U30.2 | length 508.9
  Top Layer w0.635: U30.2@76.513,18.669 76.513,21.852 77.775,23.114 77.775,32.723 76.513,33.985 U29.2@76.513,40.422 ; v1(151.765,203.378) 155.626,199.517 155.626,183.149 154.57,182.093 U9.8@154.57,178.562 ; v1(160.35,15.723) v1(168.251,15.723) ; v1(223.342,203.378) 228.948,197.772 228.948,184.633 228.854,184.539 228.854,113.716 228.76,113.622 228.76,98.417 231.242,95.936 231.242,23.063 233.299,21.006 ; v1(223.418,21.006) 233.299,21.006 ; U19.2@238.025,40.422 238.025,33.984 239.293,32.715 239.293,23.114 238.025,21.845 238.025,20.32 ; 233.299,21.006 233.934,20.371 237.974,20.371 ; 237.974,20.371 U23.2@238.025,18.669 238.025,20.32 ; 237.974,20.371 238.025,20.32
  Bottom Layer w0.635: U30.2@76.513,18.669 76.513,18.432 78.821,16.124 90.724,16.124 91.744,17.145 93.32,17.145 97.773,21.598 102.98,21.598 U13.1@105.909,18.669 105.909,17.062 108.312,14.659 155.447,14.659 158.737,17.95 160.34,17.95 v1(160.35,15.723) ; v1(151.765,203.378) v1(223.342,203.378) ; v1(168.251,15.723) 170.223,13.75 216.163,13.75 v1(223.418,21.006)
\HVID: U12.8 U27.6 U27.9 U27.10 U27.12 U27.13 U39.9 | length 195.5
  Top Layer w0.635: v1(159.461,135.513) 159.461,171.298 v1(164.694,176.53) ; U27.6@183.404,170.942 U27.9@183.404,178.562 ; v1(213.766,173.634) 213.766,140.259 215.036,138.989 215.036,118.618 212.496,116.078 212.496,100.148 216.302,96.342 U39.9@216.302,91.549
  Bottom Layer w0.635: U12.8@154.57,135.055 154.57,135.513 v1(159.461,135.513) ; v1(164.694,176.53) 172.609,176.53 173.244,177.165 U27.13@173.244,178.562 U27.12@175.784,178.562 177.41,180.188 179.238,180.188 U27.10@180.864,178.562 U27.9@183.404,178.562 ; U27.6@183.404,170.942 183.404,172.466 194.793,172.466 195.961,173.634 v1(213.766,173.634)
\MISS: U44.1 U48.6 U51.1 U62.2 | length 206.5
  Top Layer w0.635: v1(98.654,146.025) 98.654,98.4 v1(100.136,96.917) ; v1(100.533,62.179) v1(100.533,95.86) ; v1(104.639,96.393) 105.909,97.663 ; v1(105.909,96.645) v1(105.909,96.917) 105.909,97.663 ; U51.1@105.909,105.682 105.909,97.663
  Bottom Layer w0.635: v1(98.654,146.025) 102.768,150.139 109.83,150.139 U62.2@110.236,148.611 ; v1(100.136,96.917) v1(105.909,96.917) ; v1(100.533,62.179) 105.909,62.179 U44.1@105.909,62.176 ; v1(100.533,95.86) 101.067,96.393 v1(104.639,96.393) ; v1(105.909,96.645) 121.589,96.645 121.725,96.509 140.366,96.509 142.018,98.161 167.365,98.161 167.563,98.358 170.312,98.358 175.941,103.988 183.404,103.988 U48.6@183.404,105.682
\RUN: U39.6 U44.12 U45.3 U47.1 | length 170
  Top Layer w0.635: v1(138.049,73.609) 139.33,74.89 U47.1@139.33,83.929 ; v1(214.524,79.726) 216.302,81.505 U39.6@216.302,83.929
  Bottom Layer w0.635: U45.3@80.323,62.176 80.323,61.925 79.06,60.662 76.53,60.662 76.505,60.687 76.505,64.135 78.329,65.959 108.368,65.959 110.989,68.58 U44.12@110.989,69.796 110.989,71.472 120.117,71.472 122.255,73.609 v1(138.049,73.609) 160.909,73.609 164.054,76.754 211.552,76.754 v1(214.524,79.726)
\SCORE1_10: U40.6 U54.6 U54.10 U56.10 | length 106.5
  Top Layer w0.635: U56.10@184.674,69.796 184.674,75.59 182.134,78.13 U54.6@182.134,83.929 182.134,86.462 184.674,89.002 U54.10@184.674,91.549 ; v1(194.64,90.035) 194.64,44.425 v1(197.652,41.413)
  Bottom Layer w0.635: U54.10@184.674,91.549 184.674,91.288 185.926,90.035 v1(194.64,90.035) ; v1(197.652,41.413) 200.029,43.79 214.579,43.79 216.302,42.066 U40.6@216.302,40.422
\SCORE2_10: U52.2 U54.4 U54.12 U56.12 | length 135.6
  Top Layer w0.635: v1(178.333,96.926) 178.333,89.383 177.054,88.103 177.054,86.462 ; U56.12@179.594,69.796 179.594,75.59 177.054,78.13 U54.4@177.054,83.929 177.054,86.462 ; U54.12@179.594,91.549 179.594,89.002 177.054,86.462 ; U52.2@239.295,62.176 239.295,64.263 243.103,68.072 243.103,96.342 v1(242.519,96.926)
  Bottom Layer w0.635: v1(178.333,96.926) v1(242.519,96.926)
\SERVE: U42.9 U52.10 | length 108.5
  Top Layer w0.635: v1(246.915,65.634) U52.10@246.915,69.796
  Bottom Layer w0.635: U42.9@152.03,48.042 152.03,46.507 187.198,46.507 190.389,49.698 195.95,49.698 200.887,54.635 220.497,54.635 231.496,65.634 v1(246.915,65.634)
\SRST: R14.1 S1.2 U38.9 U40.10 U44.2 U44.13 U52.13 | length 362.4
  Top Layer w0.635: U44.13@108.449,69.796 U44.2@108.449,62.176 108.449,57.582 110.998,55.033 110.998,46.533 115.164,42.367 117.729,42.367 118.618,41.478 v1(118.618,38.024) ; U40.10@213.762,48.042 213.762,46.355 215.21,44.907 216.154,44.907 217.576,46.33 v1(217.576,57.353) ; S1.2@301.244,83.947 301.244,78.105 R14.1@303.911,75.438
  Bottom Layer w0.635: U38.9@25.908,91.549 25.908,89.892 35.606,89.892 51.814,73.684 62.048,73.684 68.625,67.107 107.281,67.107 108.449,68.275 U44.13@108.449,69.796 ; v1(118.618,38.024) 119.375,37.267 168.923,37.267 169.552,36.639 186.937,36.639 201.326,51.029 211.934,51.029 213.762,49.2 U40.10@213.762,48.042 ; v1(217.576,57.353) 228.498,68.275 238.023,68.275 238.557,68.809 238.557,69.796 U52.13@239.295,69.796 239.295,68.275 243.103,68.275 243.103,71.323 299.796,71.323 R14.1@303.911,75.438
\STOPG1: U28.8 U44.5 | length 162.7
  Top Layer w0.635: v1(39.421,70.129) v1(39.421,114.275) ; U44.5@116.069,62.176 116.069,60.655 119.456,57.268 v1(119.456,55.186)
  Bottom Layer w0.635: v1(39.421,70.129) 45.847,63.703 45.847,61.29 50.687,56.45 66.212,56.45 67.689,54.972 83.362,54.972 83.377,54.987 84.178,54.987 84.455,55.264 95.712,55.264 95.79,55.186 v1(119.456,55.186) ; v1(39.421,114.275) 40.208,115.062 59.512,115.062 59.817,114.757 U28.8@59.817,113.302
\STOPG2: U44.4 U53.12 | length 30.4
  Top Layer w0.635: U53.12@110.989,91.549 110.989,87.088 112.268,85.809 112.268,65.929 113.529,64.668 U44.4@113.529,62.176
\VBLANK: U12.1 U12.5 U29.10 | length 140.1
  Top Layer w0.635: v1(96.317,121.539) 96.317,95.519 96.282,95.484 96.282,89.318 97.079,88.521 v1(97.079,49.581)
  Bottom Layer w0.635: U29.10@89.213,48.042 89.213,49.259 89.535,49.581 v1(97.079,49.581) ; v1(96.317,121.539) 97.536,122.758 106.225,122.758 106.341,122.642 135.607,122.642 139.33,126.365 ; U12.1@139.33,127.435 139.33,126.365 ; U12.5@149.49,127.435 149.49,126.172 148.386,125.068 140.626,125.068 139.33,126.365
\VPAD1: U16.6 U17.3 | length 41
  Bottom Layer w0.635: U17.3@49.657,148.611 49.657,150.139 86.284,150.139 86.931,149.492 87.943,149.492 U16.6@87.943,148.611
\VPAD2: U16.11 U17.9 | length 28.6
  Bottom Layer w0.635: U17.9@57.277,156.231 57.277,154.711 82.863,154.711 U16.11@82.863,156.231
\VRESET: U5.10 U7.9 U10.1 U11.1 | length 77.1
  Top Layer w0.635: U7.9@216.302,113.302 216.302,111.811 v1(220.396,108.306)
  Bottom Layer w0.635: v1(220.396,108.306) 221.031,108.306 222.479,106.858 235.307,106.858 U10.1@235.485,105.682 235.485,104.165 254.533,104.165 255.194,104.826 U11.1@266.732,104.826 ; U11.1@266.732,105.682 U11.1@266.732,104.826 ; U5.10@278.162,91.549 278.162,93.465 274.574,97.053 271.805,97.053 266.732,102.127 U11.1@266.732,104.826
\VSYNC: U8.8 U13.2 | length 249.6
  Top Layer w0.635: v1(97.434,94.513) 97.434,90.526 98.222,89.738 98.222,18.313 100.635,15.9 106.934,15.9 108.449,17.415 U13.2@108.449,18.669
  Bottom Layer w0.635: v1(97.434,94.513) 106.731,94.513 107.591,95.374 145.955,95.374 147.428,96.848 168.698,96.848 169.073,97.223 175.76,97.223 176.632,98.095 247.599,98.095 251.995,93.699 U8.8@251.995,91.549
\VVID: U12.9 U12.11 U12.12 U28.6 U39.8 U52.11 | length 313
  Top Layer w0.635: v1(65.888,109.423) v1(65.888,117.856) ; v1(134.01,118.191) v1(134.01,133.401) ; v1(197.942,101.625) v1(197.942,131.33) ; v1(217.983,101.625) 218.842,100.766 U39.8@218.842,91.549 ; v1(244.373,88.875) 245.643,87.605 245.643,74.905 244.375,73.636 U52.11@244.375,69.796
  Bottom Layer w0.635: U28.6@57.277,105.682 57.277,108.763 57.937,109.423 v1(65.888,109.423) ; v1(65.888,117.856) 70.868,117.856 71.908,118.896 95.937,118.896 98.664,121.623 100.929,121.623 104.362,118.191 v1(134.01,118.191) ; v1(134.01,133.401) 144.41,133.401 U12.12@144.41,135.055 U12.11@146.95,135.055 148.477,133.528 150.502,133.528 U12.9@152.03,135.055 152.03,133.985 153.719,132.296 167.317,132.296 168.283,131.33 v1(197.942,131.33) ; v1(197.942,101.625) v1(217.983,101.625) 250.901,101.625 254.582,97.945 254.582,89.71 253.746,88.875 v1(244.373,88.875)
A: U56.7 U57.7 | length 35
  Bottom Layer w0.635: U57.7@153.416,62.176 153.416,63.5 154.051,64.135 157.881,64.135 158.613,64.867 183.164,64.867 184.674,63.357 U56.7@184.674,62.176
A6: U29.3 U43.4 | length 36.9
  Bottom Layer w0.635: U29.3@79.053,40.422 79.053,39.06 80.108,38.005 82.223,38.005 82.484,37.744 95.996,37.744 97.115,38.863 111.863,38.863 112.259,39.259 U43.4@112.259,40.422
AA: U24.3 U34.8 | length 129.5
  Top Layer w0.635: v1(131.191,142.545) 131.191,170.993 132.055,171.856 v1(132.055,178.562) ; v1(203.124,142.248) 203.124,144.348 204.724,145.948 206.676,145.948 207.412,146.685 U24.3@207.412,148.611
  Bottom Layer w0.635: U34.8@121.149,178.562 v1(132.055,178.562) ; v1(131.191,142.545) 134.823,142.545 136.18,141.188 167.846,141.188 168.057,141.399 202.275,141.399 v1(203.124,142.248)